# Altium PCB Breakout_14pin.PcbDoc
Units mm, origin at the board's own origin, x right, y up, seen from the top; angles counter-clockwise.
Board outline 55 x 25 mm, 2 copper layers (Top Layer, Bottom Layer), stack 1.571 mm thick; 7 components, 14 nets, 50 pads, 0 vias.
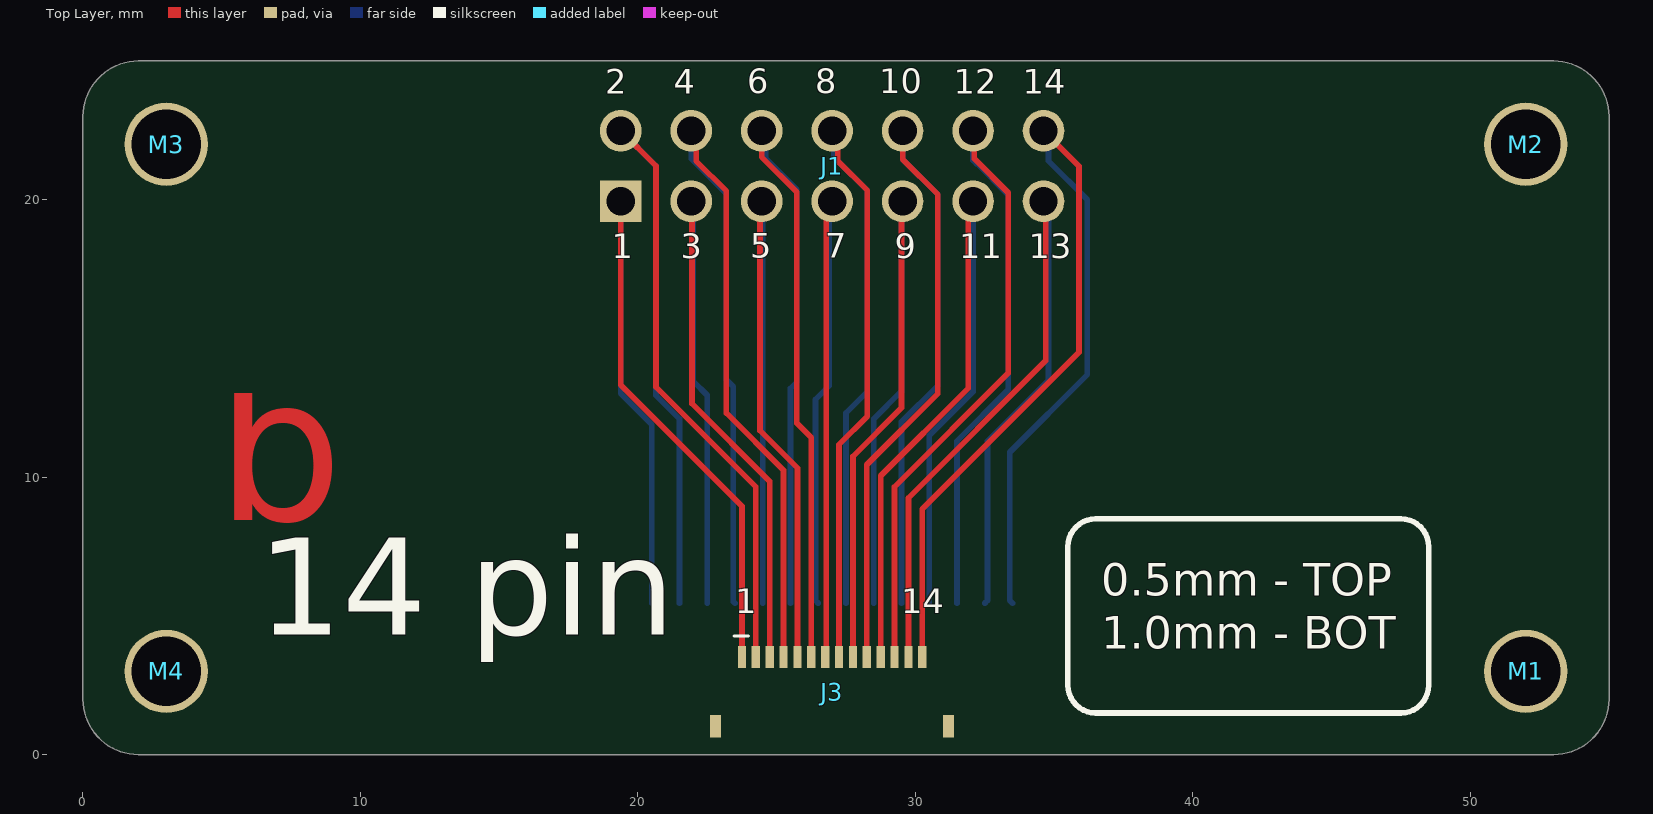
[diagram p0: Top Layer view]
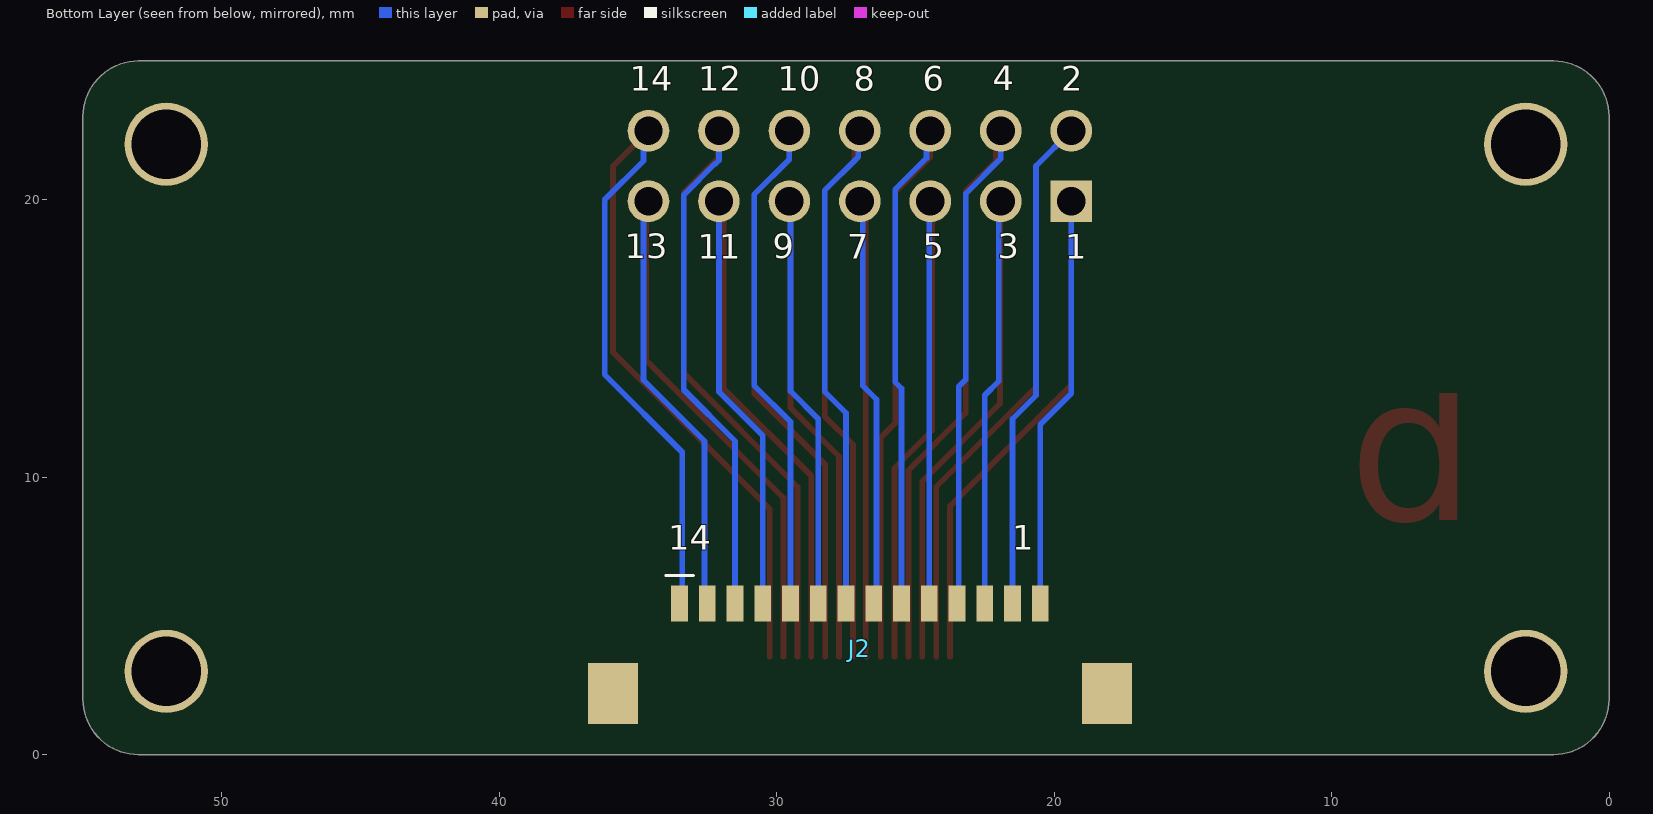
[diagram p1: Bottom Layer view, seen from below]

## Layer stack, top to bottom
Top Solder: solder mask 0.0102, Solder Resist, Dk 3.5
Top Layer: signal copper 0.0356
Dielectric 1: dielectric 1.5, FR-4, Dk 4.8
Bottom Layer: signal copper 0.0356
Bottom Solder: solder mask 0.0102, Solder Resist, Dk 3.5

## Board outline
2,0 cw(c2,2) 0,2 0,23 cw(c2,23) 2,25 53,25 cw(c53,23) 55,23 55,2 cw(c53,2) 53,0

## Design rules (kind name [scope] priority, off if disabled: settings)
Clearance [All] p1: gap=0.204 ignorepadtopadclearanceinfootprint=TRUE
DiffPairsRouting [All] p1: maxlimit=0.254 minlimit=0.064 mostfreqgap=0.127 toplayer_minwidth=0.178 toplayer_maxwidth=0.457 toplayer_prefwidth=0.457 bottomlayer_minwidth=0.178 bottomlayer_maxwidth=0.457 bottomlayer_prefwidth=0.457 impedanceprofiledriven=TRUE maxuncoupledlength=12.7
HoleSize [All] p1: absolutevalues=TRUE maxlimit=5 minlimit=0.153 maxpercent=80.000 minpercent=20.000
MinimumSolderMaskSliver [All] p1: minsoldermaskwidth=0.178
PolygonConnect [All] p1: connectstyle=Relief reliefconductorwidth=0.254 reliefentries=4 polygonreliefangle="90 Angle" airgapwidth=0.254
RoutingVias [All] p1: holewidth=0.305 width=0.61 viastyle="Through Hole" minholewidth=0.254 minwidth=0.508 maxholewidth=0.5 maxwidth=1.27
SolderMaskExpansion [All] p1: expansion=0.102 istentingtop=FALSE
Width [All] p1: maxlimit=25.4 minlimit=0.204 preferedwidth=0.254 minimp=50.000000 maximp=50.000000 favimp=50.000000
27 further rules are at their usual default settings.

## Components (designator, comment, footprint, x,y, rotation, side; value= is the part's Value field where it differs from the comment)
J1 "75869-202LF" HDR-V-2x7-KEYED 27,21.214 r180 top
J2 "XF3M(1)-1415-1B" CONN-FFC-H-14P-1MM 27,3.829 r180 bottom
J3 "FFC2B28-14-G" CONN-FFC-H-14P-0.5MM 27,3.522 r0 top
M1 "MTG_HOLE" MH_P_2.5MM 52,3 r90 top
M2 "MTG_HOLE" MH_P_2.5MM 52,22 r90 top
M3 "MTG_HOLE" MH_P_2.5MM 3,22 r90 top
M4 "MTG_HOLE" MH_P_2.5MM 3,3 r90 top

## Footprints (in the part's own frame and the unit in brackets; to place one, negate y for a bottom-side part, rotate by r counter-clockwise, add the part's x,y. Pads: shape width x height; smd on the part's side, far side on the other; paste and mask are expansions set on the pad)
CONN-FFC-H-14P-0.5MM [mm]
  rect 0.3x0.8 smd: 1(-3.25,0) 2(-2.75,0) 3(-2.25,0) 4(-1.75,0) 5(-1.25,0) 6(-0.75,0) 7(-0.25,0) 8(0.25,0) 9(0.75,0) 10(1.25,0) 11(1.75,0) 12(2.25,0) 13(2.75,0) 14(3.25,0)
  rect 0.4x0.8 smd: ME1(-4.2,-2.5) ME2(4.2,-2.5)
  silkscreen extent -3.54,0.76 -3.01,0.76, body extent -4.5,-3.1 4.5,0.15, height 1.72
CONN-FFC-H-14P-1MM [mm]
  rect 0.6x1.3 smd: 1(-6.5,1.625) 2(-5.5,1.625) 3(-4.5,1.625) 4(-3.5,1.625) 5(-2.5,1.625) 6(-1.5,1.625) 7(-0.5,1.625) 8(0.5,1.625) 9(1.5,1.625) 10(2.5,1.625) 11(3.5,1.625) 12(4.5,1.625) 13(5.5,1.625) 14(6.5,1.625)
  rect 1.8x2.2 smd: ME1(-8.9,-1.625) ME2(8.9,-1.625)
  silkscreen extent -7,2.63 -6,2.63, body extent -9.3,-3.68 9.3,2.73, height 2
HDR-V-2x7-KEYED [mm]
  rect 1.5x1.5 hole 1.02: 1(7.62,1.27)
  round 1.5 hole 1.02: 2(7.62,-1.27) 3(5.08,1.27) 4(5.08,-1.27) 5(2.54,1.27) 6(2.54,-1.27) 7(0,1.27) 8(0,-1.27) 9(-2.54,1.27) 10(-2.54,-1.27) 11(-5.08,1.27) 12(-5.08,-1.27) 13(-7.62,1.27) 14(-7.62,-1.27)
  body extent -12.5,-4.8 12.5,4.47, height 9.49
MH_P_2.5MM [mm]
  round 3 hole 2.5: 1(0,0)

## Part data
J1: library part HDR-V-2x7-M, "Headers & Wire Housings 14P DR VERT SHRD HDR TIN", Color=Blue, Manufacturer 1="Amphenol ICC / FCI", Max Operating Temperature=125°C, Max Voltage Rating (AC)=500V, Min Operating Temperature=-65°C, Package Quantity=23, Supplier Part Number 1=609-75869-202LF-ND, Category=Connectors, ComponentLink1Description=https://datasheet.ciiva.com/723/75869-723760.pdf?src-supplier=Digi-Key, ComponentLink1URL=https://datasheet.ciiva.com/723/75869-723760.pdf?src-supplier=Digi-Key, Connector Type="Male Pin", Contact Material=Bronze, Contact Mating Length=0.236inch, Contact Plating=Tin, Contact Post Length=3.05mm, Contact Type="Male Pin", Depth=9.55mm, Gender=Male, Housing Color=Blue, Housing Material=Thermoplastic, Lead Free="Lead Free", Length=24.99mm, Manufacturer Part Number 1=75869-202LF, Mount="Through Hole", Number of Contacts=14, Number of Positions=14, Number of Rows=2, Orientation=Straight, Packaging=Rail/Tube, Pitch=2.54mm, Pricing 1="1=1.00000, 10=0.87700, 100=0.75680, 500=0.61922, 1000=0.55041, 5000=0.48161, 10000=0.45753 (USD)", RoHS=Yes, Row Spacing=0.1inch, Series="Quickie™, Basics+", Stock 1=665, Supplier 1=Digi-Key, Termination=Solder
J2: library part CONN-FFC-H-14P-1MM, "1.0-mm Pitch, Dual Contact ; For FPC/FFC, 14 Contacts, RoHS", Actuator Color=Black, Flammability Rating="UL94 V-0", Housing Color=Natural, Manufacturer 1=Omron, Max Operating Temperature=85°C, Min Operating Temperature=-30°C, Supplier Part Number=Z5875CT-ND, Voltage Rating=50V, Actuator Material="Polymer,Liquid Crystal Polymer", Category="FFC / FPC", ComponentLink1Description=https://omronfs.omron.com/en_US/ecb/products/pdf/en-xf3m.pdf?src-supplier=Digi-Key, ComponentLink1URL=https://omronfs.omron.com/en_US/ecb/products/pdf/en-xf3m.pdf?src-supplier=Digi-Key, ComponentLink2Description=https://datasheet.octopart.com/XF3M%281%29-1415-1B-Omron-datasheet-67143948.pdf?src-supplier=Master+Electronics, ComponentLink2URL=https://datasheet.octopart.com/XF3M%281%29-1415-1B-Omron-datasheet-67143948.pdf?src-supplier=Master+Electronics, Contact Material="Copper Alloy", Contact Plating=Gold, Housing Material=Polymer, Manufacturer Part Number 1=XF3M(1)-1415-1B, Mating Cycles=20, Mounting Technology="Surface Mount", Number of Positions=14, Packaging="Cut Tape", Pins=14, Pricing="1=1.71, 10=1.491, 25=1.4272, 50=1.3954, 100=1.332, 250=1.20516, 500=1.11002 (USD)", RoHS=No, Series=XF3M, Stock=3056, Supplier=Digi-Key, Termination=Solder
J3: library part CONN-FFC-H-14P-0.5MM, "14W, 0.5MM Ffc Con, R/a, Dual Cont,", Manufacturer 1="Global Connector Technology", Supplier Part Number 1=71AJ9616, Category=Connectors, Manufacturer Part Number 1=FFC2B28-14-G, Pricing 1="1=0.28900, 10=0.28900, 25=0.28900, 50=0.26500, 100=0.26500, 250=0.26500, 500=0.24500 (USD)", RoHS=No, Stock 1=3095, Supplier 1=Newark
M1 M2 M3 M4: "MTG HOLE PLATED VARIOUS SIZES"

## Nets (pads, with @x,y where several pads share a name; then routed paths per layer and width w, separated by ;. In a path a pad name is that pad's centre, name@x,y a point inside that pad or via, vN(x,y) a via of type N, cw(c..) or ccw(c..) an arc to the next point about the centre after c; other vN are vias at no path point)
1: J1.1 J2.14 J3.1 | length 33.2
  Top Layer w0.204: J1.1 19.38,13.32 23.75,8.95 J3.1
  Bottom Layer w0.204: J1.1 19.38,13.02 20.5,11.9 J2.14
2: J1.2 J2.13 J3.2 | length 38.9
  Top Layer w0.204: J1.2 20.65,21.214 20.65,13.25 24.25,9.65 J3.2
  Bottom Layer w0.204: J1.2 20.65,21.214 20.65,12.95 21.5,12.1 J2.13
3: J1.3 J2.12 J3.3 | length 32.3
  Top Layer w0.204: J1.3@21.95,19.944 21.95,12.65 24.75,9.85 J3.3
  Bottom Layer w0.204: J1.3@22,19.944 22,13.452 22.5,12.952 J2.12
4: J1.4 J2.11 J3.4 | length 38
  Top Layer w0.204: J1.4 22.1,22.304 22.1,21.4 23.19,20.31 23.19,12.31 25.25,10.25 J3.4
  Bottom Layer w0.204: J1.4 21.92,21.48 23.19,20.21 23.19,13.51 23.438,13.262 23.438,5.516 J2.11
5: J1.5 J2.10 J3.5 | length 31.7
  Top Layer w0.204: J1.5@24.4,19.944 24.4,11.677 25.75,10.327 J3.5
  Bottom Layer w0.204: J2.10 J1.5@24.5,20.127
6: J1.6 J2.9 J3.6 | length 37.4
  Top Layer w0.204: J1.6 24.46,21.54 25.73,20.27 25.73,11.945 26.25,11.425 J3.6
  Bottom Layer w0.204: J1.6 24.6,22.344 24.6,21.5 25.73,20.37 25.73,13.43 25.5,13.2 J2.9
7: J1.7 J2.8 J3.7 | length 31.7
  Top Layer w0.204: J3.7 26.786,3.558 J1.7@26.786,19.944
  Bottom Layer w0.204: J2.8 26.4,5.554 26.4,12.8 26.9,13.3 J1.7@26.9,20.482
8: J1.8 J2.7 J3.8 | length 37.8
  Top Layer w0.204: J1.8 27.2,22.284 27.2,21.4 28.27,20.33 28.27,12.195 27.25,11.175 J3.8
  Bottom Layer w0.204: J1.8 27.053,22.431 27.053,21.547 28.27,20.33 28.27,13.084 27.5,12.314 J2.7
9: J1.9 J2.6 J3.9 | length 32.3
  Top Layer w0.204: J3.9 27.75,10.75 29.5,12.5 J1.9@29.5,19.944
  Bottom Layer w0.204: J2.6 28.5,12.1 29.5,13.1 J1.9@29.5,20.207
10: J1.10 J2.5 J3.10 | length 38.6
  Top Layer w0.204: J3.10 28.25,10.45 30.81,13.01 30.81,20.19 29.54,21.46 J1.10
  Bottom Layer w0.204: J2.5 29.5,12 30.81,13.31 30.81,20.19 29.54,21.46 J1.10
11: J1.11 J2.4 J3.11 | length 32.9
  Top Layer w0.204: J3.11 28.75,10.05 31.9,13.2 J1.11@31.9,19.944
  Bottom Layer w0.204: J2.4 30.5,11.5 32.08,13.08 J1.11
12: J1.12 J2.3 J3.12 | length 39.5
  Top Layer w0.204: J3.12 29.25,9.65 33.35,13.75 33.35,20.25 32.125,21.475 32.125,22.439 J1.12
  Bottom Layer w0.204: J2.3 31.5,11.3 33.35,13.15 33.35,20.167 32.217,21.3 32.2,21.3 32.08,21.42 J1.12
13: J1.13 J2.2 J3.13 | length 34.1
  Top Layer w0.204: J3.13 29.75,9.25 34.7,14.2 J1.13@34.7,20.1
  Bottom Layer w0.204: J2.2 32.6,5.554 32.6,11.3 34.8,13.5 J1.13@34.8,19.987
14: J1.14 J2.1 J3.14 | length 40.7
  Top Layer w0.204: J3.14 30.25,8.85 35.9,14.5 35.9,21.204 J1.14
  Bottom Layer w0.204: J2.1 33.4,5.554 33.4,10.9 36.2,13.7 36.2,20 34.8,21.4 34.8,22.304 J1.14
pads on no net: J2.ME1 J2.ME2 J3.ME1 J3.ME2 M1.1 M2.1 M3.1 M4.1

## Other copper
Top Layer:
  text "b" at 4.8,5.8 h13.97

## Silkscreen, mask and mechanical layers (free items; w line width, h text height)
Top Overlay:
  lines w0.2: 35.5,2.5 ccw(c36.5,2.5) 36.5,1.5 47.5,1.5 ccw(c47.5,2.5) 48.5,2.5 48.5,7.5 ccw(c47.5,7.5) 47.5,8.5 36.5,8.5 ccw(c36.5,7.5) 35.5,7.5 35.5,2.5 ; 35.5,2.5 35.5,2.5
  text "6" at 23.934,23.545 h1.5
  text "8" at 26.392,23.545 h1.5
  text "10" at 28.692,23.545 h1.5
  text "2" at 18.817,23.529 h1.5
  text "4" at 21.297,23.529 h1.5
  text "12" at 31.378,23.529 h1.5
  text "14" at 33.878,23.529 h1.5
  text "5" at 24.05,17.625 h1.5
  text "7" at 26.75,17.625 h1.5
  text "1" at 19.05,17.609 h1.5
  text "3" at 21.55,17.609 h1.5
  text "9" at 29.25,17.609 h1.5
  text "11" at 31.578,17.609 h1.5
  text "13" at 34.078,17.609 h1.5
  text "0.5mm - TOP" at 36.7,5.338 h2
  text "1" at 23.5,4.8 h1.5
  text "14" at 29.5,4.8 h1.5
  text "1.0mm - BOT" at 36.7,3.421 h2
  text "14 pin" at 6.3,3.168 h6
  text "c" at 3.169,-11.943 h50
Bottom Overlay:
  text "2" at 19.737,23.645 h1.5
  text "4" at 22.219,23.649 h1.5
  text "6" at 24.732,23.645 h1.5
  text "8" at 27.214,23.645 h1.5
  text "10" at 29.954,23.645 h1.5
  text "12" at 32.823,23.645 h1.5
  text "14" at 35.3,23.645 h1.5
  text "3" at 22.029,17.598 h1.5
  text "5" at 24.733,17.598 h1.5
  text "9" at 30.143,17.598 h1.5
  text "13" at 35.47,17.598 h1.5
  text "1" at 19.6,17.582 h1.5
  text "7" at 27.446,17.582 h1.5
  text "11" at 32.85,17.582 h1.5
  text "1" at 21.5,7.1 h1.5
  text "14" at 33.9,7.1 h1.5
Board Outline:
  lines w0.1: 27,25 27.5,25 ; 0,2 ccw(c2,2) 2,0 53,0 ccw(c53,2) 55,2 55,23 ccw(c53,23) 53,25 2,25 ccw(c2,23) 0,23 0,2